# Altium PCB bt-kbd-interposer.PcbDoc
Units mm, origin at the board's own origin, x right, y up, seen from the top; angles counter-clockwise.
Board outline 32 x 10 mm, 2 copper layers (Top Layer, Bottom Layer), stack 0.95 mm thick; 20 components, 19 nets, 51 pads, 0 vias.
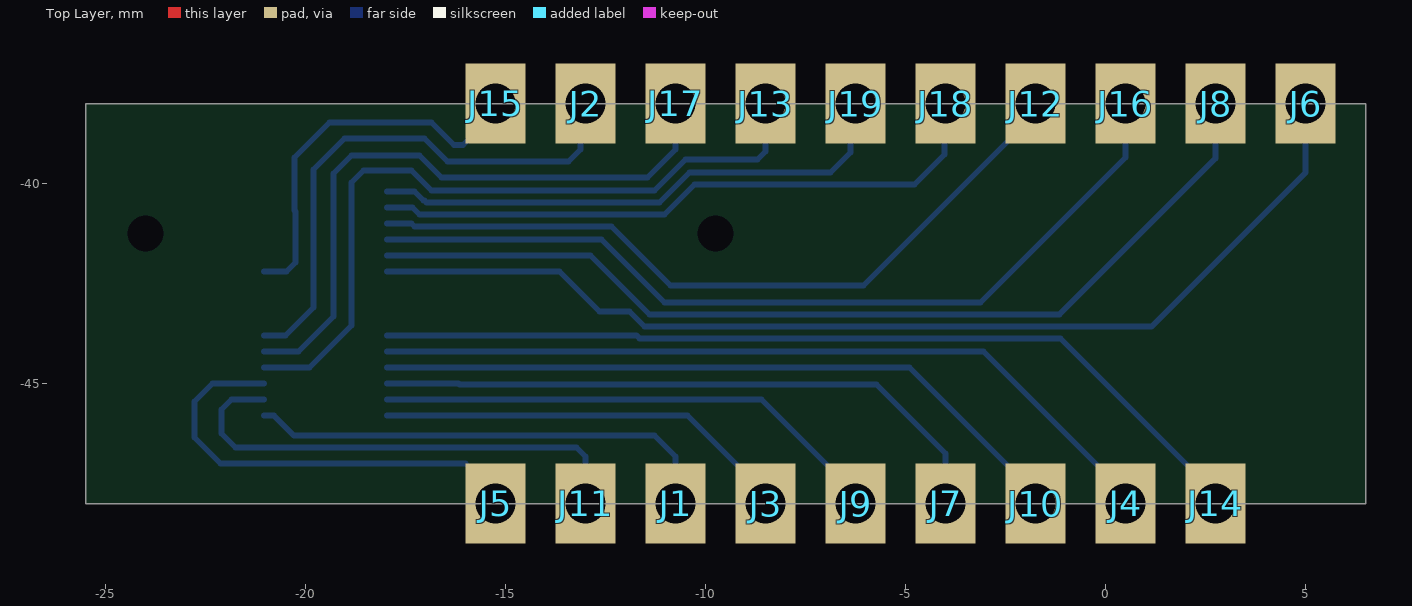
[diagram p0: Top Layer view]
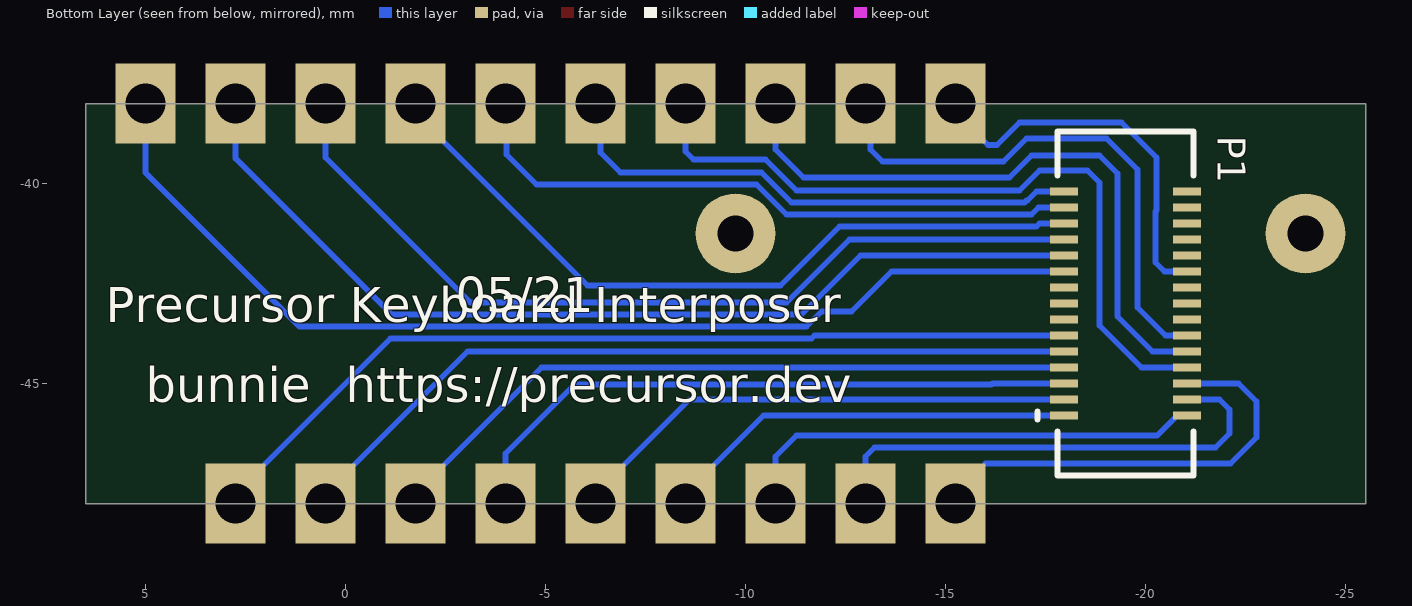
[diagram p1: Bottom Layer view, seen from below]

## Layer stack, top to bottom
Top Solder: solder mask 0.01, Solder Resist, Dk 3.5
Top Layer: signal copper 0.035
Dielectric 1: core 0.88, Core-042, Dk 4.6
Bottom Layer: signal copper 0.035
Bottom Solder: solder mask 0.01, Solder Resist, Dk 3.5

## Board outline
-25.5,-48 -25.5,-38 6.5,-38 6.5,-48

## Design rules (kind name [scope] priority, off if disabled: settings)
Clearance [All] p1: gap=0.15 ignorepadtopadclearanceinfootprint=FALSE
MinimumSolderMaskSliver [All] p1 off: minsoldermaskwidth=0.254
PolygonConnect [All] p1: connectstyle=Relief reliefconductorwidth=0.254 reliefentries=4 polygonreliefangle="90 Angle" airgapwidth=0.254
RoomDefinition interposer [InComponentClass('interposer')] p1 off: confinementstyle=ConfineIn formatcopy=TRUE lockcomponents=FALSE outline 31.498,-61.146 36.098,-61.146 36.098,-49.446 31.498,-49.446
RoutingVias [All] p1: holewidth=0.4 width=0.8 viastyle="Through Hole" minholewidth=0.25 minwidth=0.5 maxholewidth=0.4 maxwidth=0.8
SilkToSilkClearance [All] p1 off: silktosilkclearance=0.254
SilkToSolderMaskClearance [IsPad] p1 off: minsilkscreentomaskgap=0.254 clearancetoexposedcopper=TRUE
SolderMaskExpansion [All] p1 off: expansion=0.102 istentingtop=FALSE
Width [All] p1: maxlimit=5 minlimit=0.15 preferedwidth=0.2
27 further rules are at their usual default settings.

## Components (designator, comment, footprint, x,y, rotation, side; value= is the part's Value field where it differs from the comment)
J1 "solder pad (DNP)" TP_TH1.0mm_1.5x2mm_SQ -10.75,-48 r0 top
J2 "solder pad (DNP)" TP_TH1.0mm_1.5x2mm_SQ -13,-38 r0 top
J3 "solder pad (DNP)" TP_TH1.0mm_1.5x2mm_SQ -8.5,-48 r0 top
J4 "solder pad (DNP)" TP_TH1.0mm_1.5x2mm_SQ 0.5,-48 r0 top
J5 "solder pad (DNP)" TP_TH1.0mm_1.5x2mm_SQ -15.25,-48 r0 top
J6 "solder pad (DNP)" TP_TH1.0mm_1.5x2mm_SQ 5,-38 r0 top
J7 "solder pad (DNP)" TP_TH1.0mm_1.5x2mm_SQ -4,-48 r0 top
J8 "solder pad (DNP)" TP_TH1.0mm_1.5x2mm_SQ 2.75,-38 r0 top
J9 "solder pad (DNP)" TP_TH1.0mm_1.5x2mm_SQ -6.25,-48 r0 top
J10 "solder pad (DNP)" TP_TH1.0mm_1.5x2mm_SQ -1.75,-48 r0 top
J11 "solder pad (DNP)" TP_TH1.0mm_1.5x2mm_SQ -13,-48 r0 top
J12 "solder pad (DNP)" TP_TH1.0mm_1.5x2mm_SQ -1.75,-38 r0 top
J13 "solder pad (DNP)" TP_TH1.0mm_1.5x2mm_SQ -8.5,-38 r0 top
J14 "solder pad (DNP)" TP_TH1.0mm_1.5x2mm_SQ 2.75,-48 r0 top
J15 "solder pad (DNP)" TP_TH1.0mm_1.5x2mm_SQ -15.25,-38 r0 top
J16 "solder pad (DNP)" TP_TH1.0mm_1.5x2mm_SQ 0.5,-38 r0 top
J17 "solder pad (DNP)" TP_TH1.0mm_1.5x2mm_SQ -10.75,-38 r0 top
J18 "solder pad (DNP)" TP_TH1.0mm_1.5x2mm_SQ -4,-38 r0 top
J19 "solder pad (DNP)" TP_TH1.0mm_1.5x2mm_SQ -6.25,-38 r0 top
P1 "DF40HC(3.0)-30DS-0.4V(51)" HRS_DF40HC(3.0)-30DS-0.4V(51) -19.5,-43 r270 bottom locked

## Footprints (in the part's own frame and the unit in brackets; to place one, negate y for a bottom-side part, rotate by r counter-clockwise, add the part's x,y. Pads: shape width x height; smd on the part's side, far side on the other; paste and mask are expansions set on the pad)
HRS_DF40HC(3.0)-30DS-0.4V(51) [mm] "0.4mm Pitch, Board to Board Connector, 3.0mm mated height"
  rect 0.2x0.7 smd mask+0.06: 1(2.8,-1.54) 2(2.4,-1.54) 3(2,-1.54) 4(1.6,-1.54) 5(1.2,-1.54) 6(0.8,-1.54) 7(0.4,-1.54) 8(0,-1.54) 9(-0.4,-1.54) 10(-0.8,-1.54) 11(-1.2,-1.54) 12(-1.6,-1.54) 13(-2,-1.54) 14(-2.4,-1.54) 15(-2.8,-1.54) 16(2.8,1.54) 17(2.4,1.54) 18(2,1.54) 19(1.6,1.54) 20(1.2,1.54) 21(0.8,1.54) 22(0.4,1.54) 23(0,1.54) 24(-0.4,1.54) 25(-0.8,1.54) 26(-1.2,1.54) 27(-1.6,1.54) 28(-2,1.54) 29(-2.4,1.54) 30(-2.8,1.54)
  silkscreen extent -4.3,-2.2 4.3,1.7, body extent -4.3,-1.69 4.3,1.69, height 2.89
TP_TH1.0mm_1.5x2mm_SQ [mm] "Throughole 1mm dia 1.5x2mm SQ pad"
  rect 1.5x2 hole 1: 1(0,0)

## Part data
J1 J2 J3 J4 J5 J6 J7 J8 J9 J10 J11 J12 J13 J14 J15 J16 J17 J18 J19: library part CON1, "Connector", MPN=DNP, MYPN=J-TP-PWRTAP-0603, VENDOR=DNP
P1: library part "Header 15X2A", "Header, 15-Pin, Dual row", LatestRevisionDate=17-Jul-2002, LatestRevisionNote="Re-released for DXP Platform.", MPN=DF40HC(3.0)-30DS-0.4V(51), MYPN=J-DF40HC(3.0)-30DS-0.4V(51), Publisher="Altium Limited", System=Connector, VENDOR=Hirose

## Free pads (board coordinates)
  round 0 / inner round 2 / far side round 2 hole 0.9: 0(-24,-41.25) 0(-9.75,-41.25)

## Nets (pads, with @x,y where several pads share a name; then routed paths per layer and width w, separated by ;. In a path a pad name is that pad's centre, name@x,y a point inside that pad or via, vN(x,y) a via of type N, cw(c..) or ccw(c..) an arc to the next point about the centre after c; other vN are vias at no path point)
KEY0: J1.1 P1.16 | length 11.9
  Bottom Layer w0.15: P1.16 -20.79,-45.8 -20.29,-46.3 -11.275,-46.3 -10.75,-46.825 J1.1
KEY1: J3.1 P1.1 | length 10.5
  Bottom Layer w0.15: P1.1 -10.45,-45.8 -8.5,-47.75 J3.1
KEY2: J5.1 P1.18 | length 11.2
  Bottom Layer w0.15: P1.18 -22.325,-45 -22.775,-45.45 -22.775,-46.35 -22.125,-47 -16,-47 -15.25,-47.75 J5.1
KEY3: J7.1 P1.3 | length 15.9
  Bottom Layer w0.15: P1.3 -16.175,-45 -16.15,-45.025 -5.725,-45.025 -4,-46.75 J7.1
KEY4: J9.1 P1.2 | length 12.9
  Bottom Layer w0.15: P1.2 -8.6,-45.4 -6.25,-47.75 J9.1
KEY5: J11.1 P1.17 | length 12.3
  Bottom Layer w0.15: P1.17 -21.85,-45.4 -22.1,-45.65 -22.1,-46.25 -21.75,-46.6 -13.225,-46.6 -13,-46.825 J11.1
KEY6: J13.1 P1.19 | length 18.5
  Bottom Layer w0.15: P1.19 -19.9,-44.6 -18.85,-43.55 -18.85,-39.975 -18.55,-39.675 -17.35,-39.675 -16.85,-40.175 -11.275,-40.175 -10.5,-39.4 -8.7,-39.4 -8.5,-39.2 J13.1
KEY7: J15.1 P1.25 | length 9.7
  Bottom Layer w0.15: P1.25 -20.475,-42.2 -20.25,-41.975 -20.25,-40.7 -20.275,-40.675 -20.275,-39.35 -19.4,-38.475 -16.85,-38.475 -16.287,-39.038 -16.063,-39.038 -15.95,-38.925 -15.925,-38.925 -15.25,-38.25 J15.1
KEY8: J17.1 P1.20 | length 16.1
  Bottom Layer w0.15: P1.20 -20.175,-44.2 -19.3,-43.325 -19.3,-39.75 -18.85,-39.3 -17.15,-39.3 -16.6,-39.85 -11.45,-39.85 -10.75,-39.15 J17.1
KEY9: J2.1 P1.21 | length 13.5
  Bottom Layer w0.15: P1.21 -20.5,-43.8 -19.8,-43.1 -19.8,-39.65 -19.025,-38.875 -17.025,-38.875 -16.45,-39.45 -13.425,-39.45 -13.125,-39.15 -13.125,-38.125 J2.1
KEY10: J4.1 P1.5 | length 20.2
  Bottom Layer w0.15: P1.5 -3.05,-44.2 0.5,-47.75 J4.1
KEY11: J6.1 P1.10 | length 26.9
  Bottom Layer w0.15: P1.10 -13.65,-42.2 -12.65,-43.2 -11.899,-43.2 -11.524,-43.575 1.154,-43.575 5,-39.729 J6.1
KEY12: J8.1 P1.11 | length 24.3
  Bottom Layer w0.15: P1.11 -12.875,-41.8 -11.4,-43.275 -1.154,-43.275 2.75,-39.371 J8.1
KEY13: J10.1 P1.4 | length 17.8
  Bottom Layer w0.15: P1.4 -4.9,-44.6 -1.75,-47.75 J10.1
KEY14: J12.1 P1.13 | length 18.9
  Bottom Layer w0.15: P1.13 -17.349,-41 -17.274,-41.075 -12.35,-41.075 -10.875,-42.55 -6.05,-42.55 -1.75,-38.25 J12.1
KEY15: J14.1 P1.6 | length 22.6
  Bottom Layer w0.15: P1.6 -11.724,-43.8 -11.649,-43.875 -1.125,-43.875 2.75,-47.75 J14.1
KEY16: J16.1 P1.12 | length 22
  Bottom Layer w0.15: P1.12 -12.6,-41.4 -11.025,-42.975 -3.125,-42.975 0.5,-39.35 J16.1
KEY17: J18.1 P1.14 | length 15.9
  Bottom Layer w0.15: P1.14 -17.325,-40.6 -17.15,-40.775 -11.026,-40.775 -10.276,-40.025 -4.775,-40.025 -4.025,-39.275 -4.025,-38.025 J18.1
KEY18: J19.1 P1.15 | length 13.5
  Bottom Layer w0.15: P1.15 -17.275,-40.2 -17.05,-40.425 -17.024,-40.425 -16.974,-40.475 -11.15,-40.475 -10.4,-39.725 -6.875,-39.725 -6.375,-39.225 -6.375,-38.125 J19.1
pads on no net: P1.7 P1.8 P1.9 P1.22 P1.23 P1.24 P1.26 P1.27 P1.28 P1.29 P1.30

## Silkscreen, mask and mechanical layers (free items; w line width, h text height)
Bottom Overlay:
  text "05/21" at -2.75,-43.5 h1.5
  text "Precursor Keyboard Interposer" at 6,-43.75 h1.5
  text "https://precursor.dev" at 0,-45.75 h1.5
  text "bunnie" at 5,-45.75 h1.5
Mechanical 1:
  the board outline again, w0.11
  text "Board outline - cut through rectangle pads to make solder castellations on edge" at -31.85,-52.35 h0.75
Mechanical 2:
  drawing of 1639 lines, arcs and shapes, not listed
Mechanical 3:
  drawing of 165 lines, arcs and shapes, not listed
  text "Layer" at 38.366,-0.046 h1.52
  text "Name" at 48.778,-0.046 h1.52
  text "Material" at 72.394,-0.046 h1.52
  text "Thickness" at 94.232,-0.046 h1.52
  text "Constant" at 110.737,-0.046 h1.52
  text "Board Layer Stack" at 125.212,-0.046 h1.52
  text "Top Solder" at 48.778,-3.094 h1.52
  text "Solder Resist" at 72.394,-3.094 h1.52
  text "0.010mm" at 94.232,-3.094 h1.52
  text "3.5" at 110.737,-3.094 h1.52
  text "1" at 38.366,-6.142 h1.52
  text "Top Layer" at 48.778,-6.142 h1.52
  text "CF-004" at 72.394,-6.142 h1.52
  text "0.035mm" at 94.232,-6.142 h1.52
  text "Dielectric 1" at 48.778,-9.19 h1.52
  text "Core-042" at 72.394,-9.19 h1.52
  text "0.880mm" at 94.232,-9.19 h1.52
  text "4.6" at 110.737,-9.19 h1.52
  text "2" at 38.366,-12.238 h1.52
  text "Bottom Layer" at 48.778,-12.238 h1.52
  text "CF-004" at 72.394,-12.238 h1.52
  text "0.035mm" at 94.232,-12.238 h1.52
  text "Bottom Solder" at 48.778,-15.286 h1.52
  text "Solder Resist" at 72.394,-15.286 h1.52
  text "0.010mm" at 94.232,-15.286 h1.52
  text "3.5" at 110.737,-15.286 h1.52
  text "Bottom Overlay" at 48.778,-18.334 h1.52
  text "Total board thickness:" at 38.366,-21.382 h1.52
  text "0.970mm" at 94.232,-21.382 h1.52
  text "Finish -- immersion gold" at 38.4,-25.5 h1
  text "Solder mask clear (transparent) / silkscreen white" at 38.475,-29.525 h1
  text "0.95 +0.0/-0.1mm nominal finished thickness /  / Do not exceed 0.95mm total thickness" at 88.425,-40.216 h1.5
Mechanical 4:
  drawing of 1801 lines, arcs and shapes, not listed
  text "KEY7" at -14.9,-36.35 h0.75 r90
  text "KEY9" at -12.65,-36.35 h0.75 r90
  text "KEY8" at -10.4,-36.35 h0.75 r90
  text "KEY6" at -8.15,-36.35 h0.75 r90
  text "KEY18" at -5.9,-36.35 h0.75 r90
  text "KEY17" at -3.65,-36.35 h0.75 r90
  text "KEY14" at -1.4,-36.35 h0.75 r90
  text "KEY16" at 0.85,-36.35 h0.75 r90
  text "KEY12" at 3.1,-36.35 h0.75 r90
  text "KEY11" at 5.35,-36.35 h0.75 r90
  text "KEY2" at -14.9,-52.35 h0.75 r90
  text "KEY5" at -12.65,-52.35 h0.75 r90
  text "KEY0" at -10.4,-52.35 h0.75 r90
  text "KEY1" at -8.15,-52.35 h0.75 r90
  text "KEY4" at -5.9,-52.35 h0.75 r90
  text "KEY3" at -3.65,-52.35 h0.75 r90
  text "KEY13" at -1.4,-52.35 h0.75 r90
  text "KEY10" at 0.85,-52.35 h0.75 r90
  text "KEY15" at 3.1,-52.35 h0.75 r90